# Altium PCB CS Ranka AB.PcbDoc
Units mm, origin at the board's own origin, x right, y up, seen from the top; angles counter-clockwise.
Board outline 17.24 x 36.75 mm, 4 copper layers (Top Layer, Layer 1, Layer 2, Bottom Layer), stack 1.781 mm thick; 13 components, 64 nets, 198 pads, 83 vias.
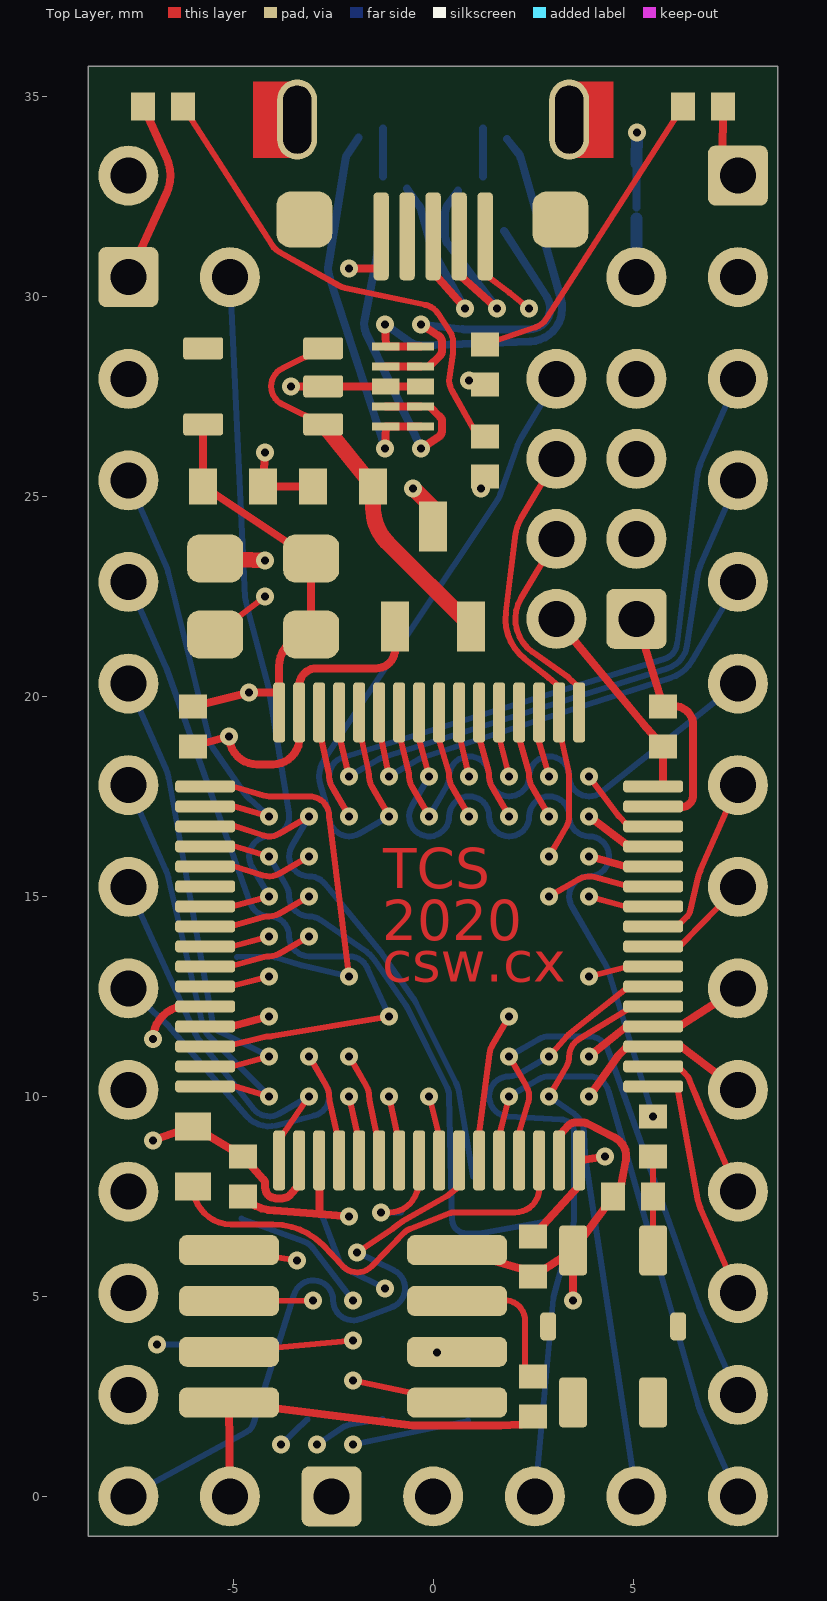
[diagram p0: Top Layer view]
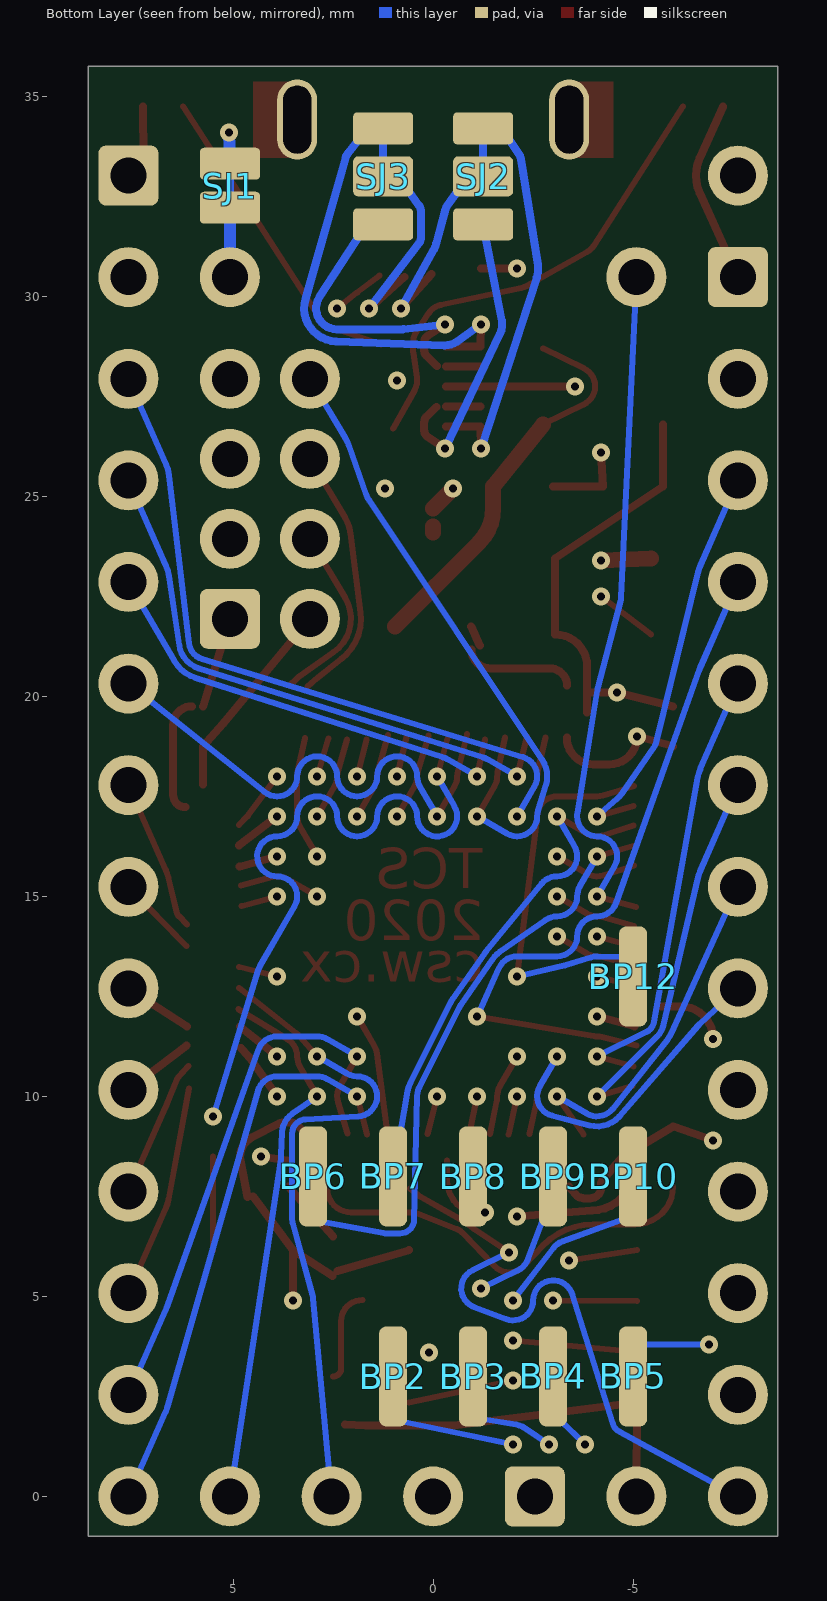
[diagram p1: Bottom Layer view, seen from below]
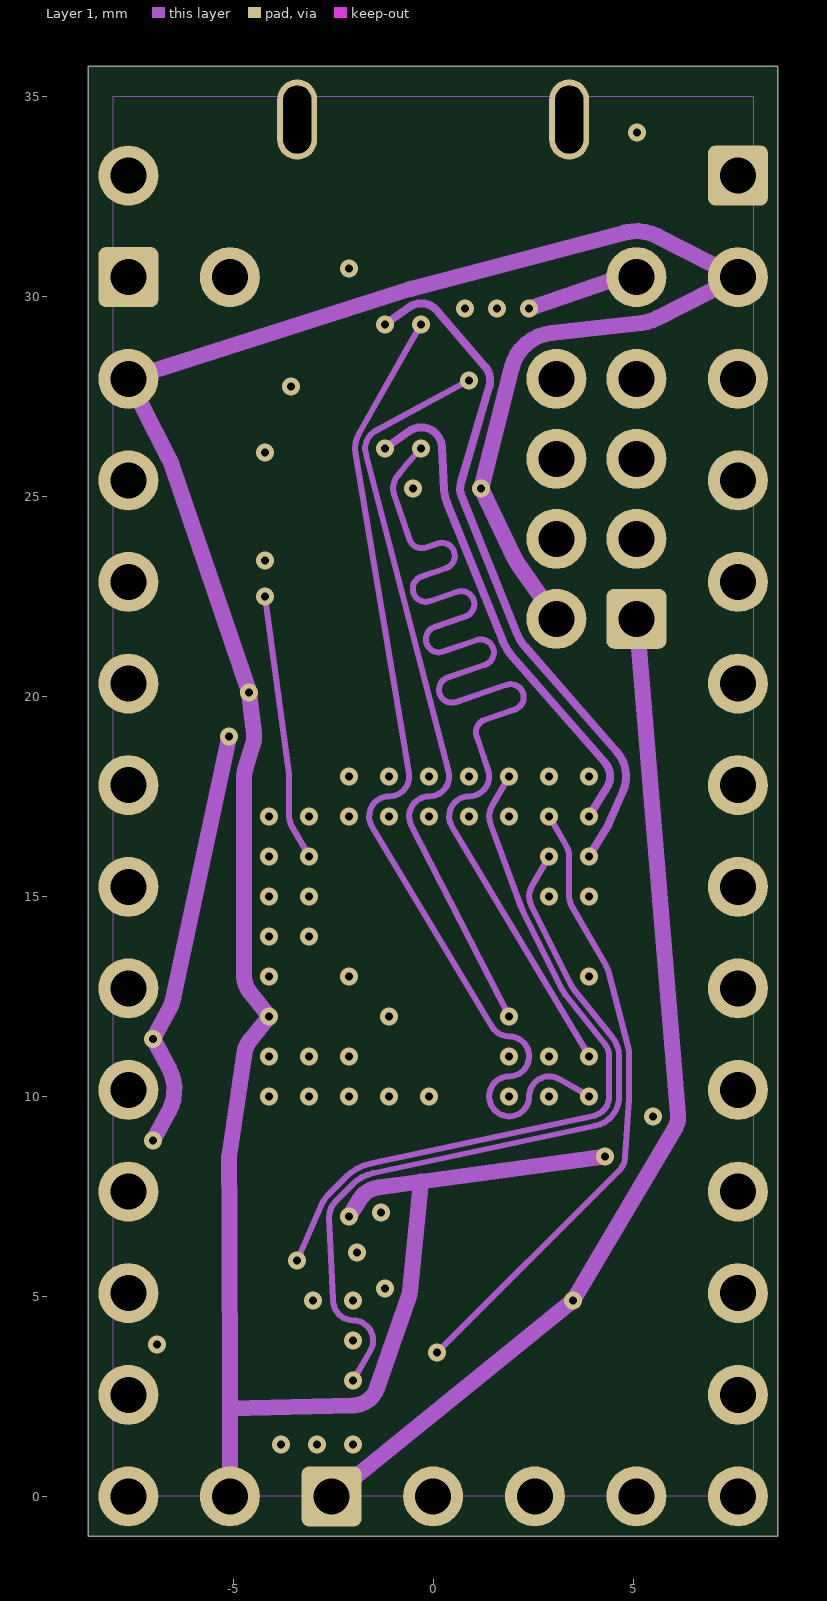
[diagram p2: Layer 1]
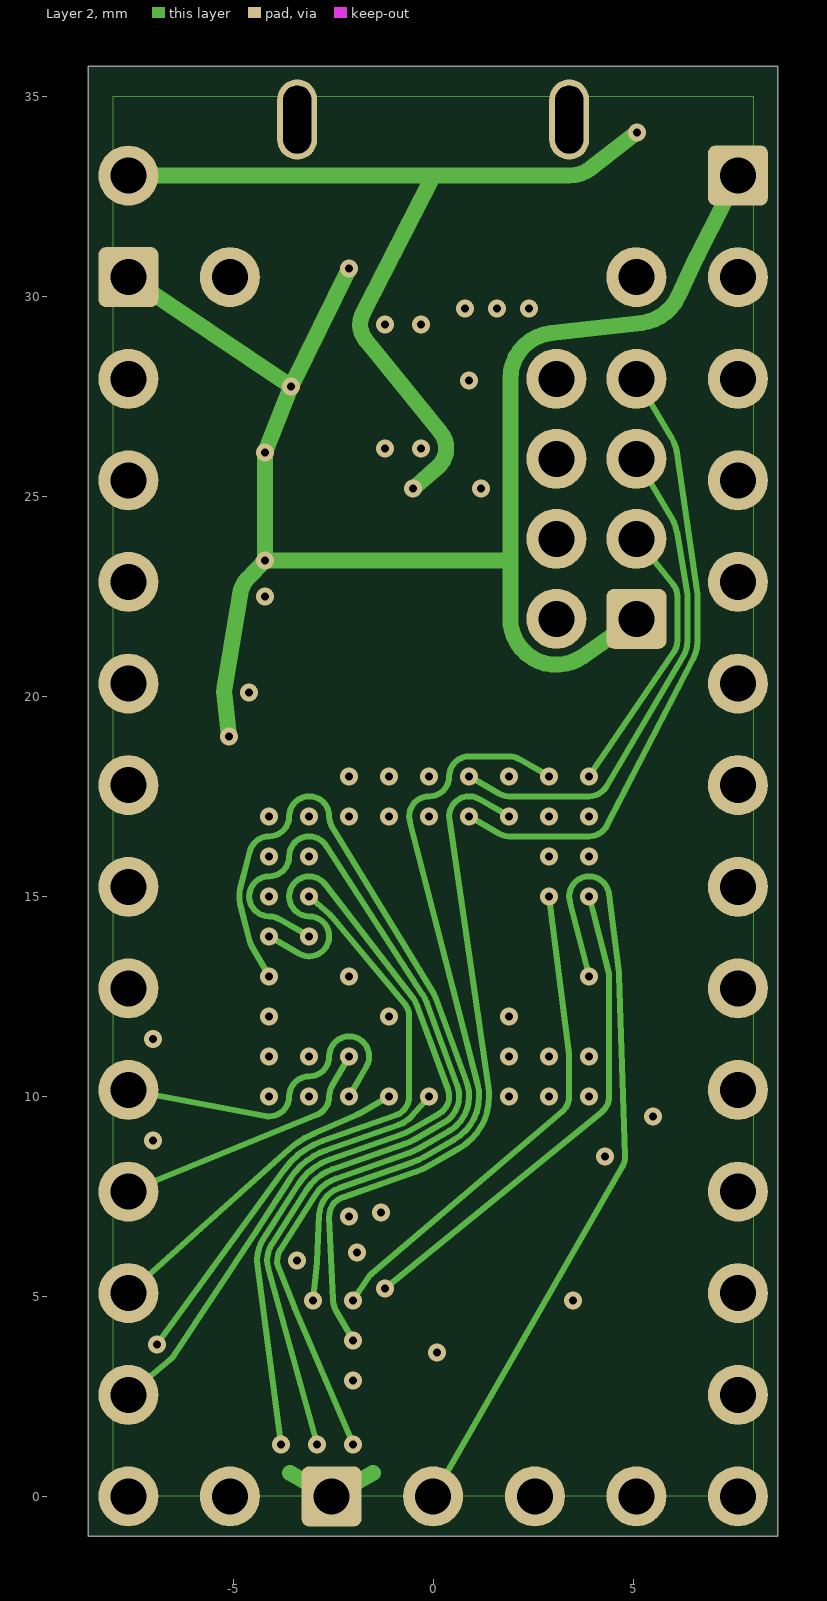
[diagram p3: Layer 2]

## Layer stack, top to bottom
Top Solder: solder mask 0.0254, SM-001, Dk 4
Top Layer: signal copper 0.035
Dielectric 2: prepreg 0.0711, PP-006, Dk 4.1
Layer 1: signal copper 0.035
Dielectric 1: core 1.4986, Core-043, Dk 4.3
Layer 2: signal copper 0.035
Dielectric 3: prepreg 0.0711, PP-006, Dk 4.1
Bottom Layer: signal copper 0.035
Bottom Solder: solder mask 0.0254, SM-001, Dk 4

## Board outline
-8.62,-1 8.62,-1 8.62,35.75 -8.62,35.75

## Design rules (kind name [scope] priority, off if disabled: settings)
Clearance [All] p1: gap=0.2 ignorepadtopadclearanceinfootprint=TRUE except(0: Arc-Hole Track-Hole SMDPad-Hole THPad-Hole Via-Hole Fill-Hole Poly-Hole Region-Hole Text-Hole; 0.1: Arc-Arc Arc-Track Arc-SMDPad Track-Track Track-SMDPad; 0.15: SMDPad-SMDPad; 0.3: Via-Via; 0.5: THPad-THPad)
DiffPairsRouting [All] p1: maxlimit=3 minlimit=0.2 mostfreqgap=0.2 toplayer_minwidth=0.15 toplayer_maxwidth=1 toplayer_prefwidth=0.2 midlayer1_maxgap=0.254 midlayer1_minwidth=0.15 midlayer1_maxwidth=0.381 midlayer1_prefwidth=0.2 midlayer2_maxgap=0.254 midlayer2_minwidth=0.15 midlayer2_maxwidth=0.381 midlayer2_prefwidth=0.2 bottomlayer_minwidth=0.15 bottomlayer_maxwidth=1 bottomlayer_prefwidth=0.2 maxuncoupledlength=12.7
HoleSize [All] p1: absolutevalues=TRUE maxlimit=6.3 minlimit=0.2 maxpercent=80.000 minpercent=20.000
MinimumAnnularRing [All] p1: minimumring=0.13
PlaneClearance [All] p1: clearance=0.5
PlaneConnect [All] p1: planeconnectstyle=Relief reliefexpansion=0.5 reliefentries=4 reliefconductorwidth=0.3 reliefairgap=0.3
PolygonConnect [All] p1: connectstyle=Relief reliefconductorwidth=0.3 reliefentries=4 polygonreliefangle="45 Angle" airgapwidth=0.3
RoutingVias [All] p1: holewidth=0.711 width=1.27 viastyle="Through Hole" minholewidth=0.711 minwidth=1.27 maxholewidth=0.711 maxwidth=1.27
SolderMaskExpansion [All] p1: expansion=0.102 istentingtop=FALSE
UnRoutedNet [All] p1: checkbadconnections=TRUE
Width "Width GND" [InNet('GND')] p1: maxlimit=50 minlimit=0.127 preferedwidth=0.4 toplayer_prefwidth=0.2 bottomlayer_prefwidth=0.2 minimp=50.000000 maximp=50.000000 favimp=50.000000
Width "Width 3V3" [InNet('3V3')] p2: maxlimit=50 minlimit=0.127 preferedwidth=0.4 toplayer_prefwidth=0.2 bottomlayer_prefwidth=0.2 minimp=50.000000 maximp=50.000000 favimp=50.000000
Width [All] p3: maxlimit=50 minlimit=0.1 preferedwidth=0.15
25 further rules are at their usual default settings.

## Classes and differential pairs
differential pair USB: +USB_P -USB_N
differential pair OTG-HS: +OTG-HS_P -OTG-HS_N
differential pair OTG-FS: +OTG-FS_P -OTG-FS_N

## Components (designator, comment, footprint, x,y, rotation, side; value= is the part's Value field where it differs from the comment)
BP2 "CS-TP-A-Compact" CS-TP-A-Compact 1,3 r90 bottom
BP3 "CS-TP-A-Compact" CS-TP-A-Compact -1,3 r90 bottom
BP4 "CS-TP-A-Compact" CS-TP-A-Compact -3,3 r90 bottom
BP5 "CS-TP-A-Compact" CS-TP-A-Compact -5,3 r90 bottom
BP6 "CS-TP-A-Compact" CS-TP-A-Compact 3,8 r90 bottom
BP7 "CS-TP-A-Compact" CS-TP-A-Compact 1,8 r90 bottom
BP8 "CS-TP-A-Compact" CS-TP-A-Compact -1,8 r90 bottom
BP9 "CS-TP-A-Compact" CS-TP-A-Compact -3,8 r90 bottom
BP10 "CS-TP-A-Compact" CS-TP-A-Compact -5,8 r90 bottom
BP12 "CS-TP-A-Compact" CS-TP-A-Compact -5,13 r90 bottom
SJ1 "CS-Select-B-2-1" CS-Select-B-2-1 5.08,32.766 r90 bottom locked net-tie
SJ2 "CS-Select-B-3-1" CS-Select-B-3-1 -1.25,33 r270 bottom locked net-tie
SJ3 "CS-Select-B-3-1" CS-Select-B-3-1 1.25,33 r270 bottom locked net-tie

## Footprints (in the part's own frame and the unit in brackets; to place one, negate y for a bottom-side part, rotate by r counter-clockwise, add the part's x,y. Pads: shape width x height; smd on the part's side, far side on the other; paste and mask are expansions set on the pad)
CS-Select-B-2-1 [mm] "Solder jumper - Type B improved - 2 contacts, connected pair"
  rrect25% 0.8x1.5 smd mask+0.15: 1(-0.55,0) 2(0.55,0)
  Top Layer lines w0.2: -0.55,0 0.55,0
CS-Select-B-3-1 [mm] "Solder jumper - Type B improved - 3 contacts, connected pair"
  rrect25% 0.8x1.5 smd mask+0.15: 1(-1.2,0) 3(1.2,0)
  rrect25% 1x1.5 smd mask+0.15: 2(0,0)
  Top Layer lines w0.2: 0,0 -1.2,0
CS-TP-A-Compact [mm] "Breakout pad"
  rrect50% 2.5x0.7 smd paste-2: 1(0,0)

## Part data
SJ1: "Solder jumper - Type B improved - 2 contacts, connected pair"
SJ2 SJ3: "Solder jumper - Type B improved - 3 contacts, connected pair"

## Free pads (board coordinates)
  round 1.5 hole 0.9: 1(-7.62,33.02) 1(-5.08,0) 1(-5.08,30.48) 1(3.08,21.94) 1(5.08,30.48) 2(3.08,23.94) 2(7.62,30.48) 3(-7.62,27.94) 3(0,0) 3(3.08,25.94) 3(7.62,27.94) 4(-7.62,25.4) 4(2.54,0) 4(3.08,27.94) 4(7.62,25.4) 5(-7.62,22.86) 5(5.08,27.94) 5(5.08,0) 5(7.62,22.86) 6(-7.62,20.32) 6(5.08,25.94) 6(7.62,20.32) 7(-7.62,17.78) 7(5.08,23.94) 7(7.62,17.78) 8(-7.62,15.24) 8(7.62,15.24) 9(-7.62,12.7) 9(7.62,12.7) 10(-7.62,10.16) 10(7.62,10.16) 11(-7.62,7.62) 11(7.62,7.62) 12(-7.62,5.08) 12(7.62,5.08) 13(-7.62,2.54) 13(7.62,2.54) 14(-7.62,0) 14(7.62,0)
  rect 0.6x0.7 smd: 1(-6.25,34.75) 1(4.5,7.5) 1(7.25,34.75) 2(-7.25,34.75) 2(5.5,7.5) 2(6.25,34.75)
  rect 0.9x0.7 smd: 1(-6,7.75) 2(-6,9.25)
  rect 0.7x0.6 smd: 1(-6,18.75) 1(-4.75,8.5) 1(1.3,26.5) 1(1.3,28.8) 1(2.5,3) 1(2.5,5.5) 1(5.5,8.5) 1(5.75,19.75) 2(-6,19.75) 2(-4.75,7.5) 2(1.3,25.5) 2(1.3,27.8) 2(2.5,2) 2(2.5,6.5) 2(5.5,9.5) 2(5.75,18.75)
  rect 0.7x0.9 smd: 1(-5.75,25.25) 1(-1.5,25.25) 2(-4.25,25.25) 2(-3,25.25)
  rrect50% 1.5x0.3 smd: 1(-5.7,17.75) 2(-5.7,17.25) 3(-5.7,16.75) 4(-5.7,16.25) 5(-5.7,15.75) 6(-5.7,15.25) 7(-5.7,14.75) 8(-5.7,14.25) 9(-5.7,13.75) 10(-5.7,13.25) 11(-5.7,12.75) 12(-5.7,12.25) 13(-5.7,11.75) 14(-5.7,11.25) 15(-5.7,10.75) 16(-5.7,10.25) 33(5.5,10.25) 34(5.5,10.75) 35(5.5,11.25) 36(5.5,11.75) 37(5.5,12.25) 38(5.5,12.75) 39(5.5,13.25) 40(5.5,13.75) 41(5.5,14.25) 42(5.5,14.75) 43(5.5,15.25) 44(5.5,15.75) 45(5.5,16.25) 46(5.5,16.75) 47(5.5,17.25) 48(5.5,17.75)
  rrect50% 1.4x1.2 smd: 1(-3.05,23.45) 2(-5.45,23.45) 3(-5.45,21.55) 4(-3.05,21.55)
  rrect25% 1x0.55 smd: 1(-2.75,26.8) 2(-2.75,27.75) 3(-2.75,28.7) 4(-5.75,28.7) 5(-5.75,26.8)
  rect 0.68x0.2 smd: 1(-1.185,28.75) 2(-1.185,28.25) 4(-1.185,27.25) 5(-1.185,26.75) 6(-0.315,26.75) 7(-0.315,27.25) 9(-0.315,28.25) 10(-0.315,28.75)
  rect 0.7x1.25 smd: 1(-0.95,21.75) 2(0.95,21.75) 3(0,24.25)
  rrect50% 2.5x0.75 smd: 1(0.6,2.345) 2(0.6,3.615) 3(0.6,4.885) 4(0.6,6.155) 5(-5.1,6.155) 6(-5.1,4.885) 7(-5.1,3.615) 8(-5.1,2.345)
  rrect50% 0.38x2.2 smd: 1(1.3,31.5) 2(0.65,31.5) 3(0,31.5) 4(-0.65,31.5) 5(-1.3,31.5)
  rrect25% 0.7x1.25 smd: 1(5.501,6.15) 2(5.501,2.35)
  rrect25% 1.5x1.5 hole 0.9: 1(7.62,33.02) 2(-7.62,30.48) 2(-2.54,0) 8(5.08,21.94)
  rect 0.68x0.4 smd: 3(-1.185,27.75) 8(-0.315,27.75)
  rrect25% 0.701x1.25 smd: 3(3.5,6.15) 4(3.5,2.35)
  rrect50% 0.399x0.701 smd: 5(6.125,4.25)
  rrect50% 0.401x0.701 smd: 6(2.875,4.25)
  oval 1x2 hole 0.7 slot 1.7 at 90 deg: 6(3.4,34.42) 7(-3.4,34.42)
  rrect50% 1.4x1.4 smd: 8(3.179,31.92) 9(-3.22,31.92)
  rrect50% 0.3x1.5 smd: 17(-3.85,8.4) 18(-3.35,8.4) 19(-2.85,8.4) 20(-2.35,8.4) 21(-1.85,8.4) 22(-1.35,8.4) 23(-0.85,8.4) 24(-0.35,8.4) 25(0.15,8.4) 26(0.65,8.4) 27(1.15,8.4) 28(1.65,8.4) 29(2.15,8.4) 30(2.65,8.4) 31(3.15,8.4) 32(3.65,8.4) 49(3.65,19.6) 50(3.15,19.6) 51(2.65,19.6) 52(2.15,19.6) 53(1.65,19.6) 54(1.15,19.6) 55(0.65,19.6) 56(0.15,19.6) 57(-0.35,19.6) 58(-0.85,19.6) 59(-1.35,19.6) 60(-1.85,19.6) 61(-2.35,19.6) 62(-2.85,19.6) 63(-3.35,19.6) 64(-3.85,19.6)

## Via types
v1: diameter 0.45, hole 0.2, Top Layer to Bottom Layer, tented both sides, 83 vias

## Nets (pads, with @x,y where several pads share a name; then routed paths per layer and width w, separated by ;. In a path a pad name is that pad's centre, name@x,y a point inside that pad or via, vN(x,y) a via of type N, cw(c..) or ccw(c..) an arc to the next point about the centre after c; other vN are vias at no path point)
3V3: pad.1@3.08,21.94 pad.1@-3.05,23.45 pad.1@-5.08,0 pad.1@-5.75,25.25 pad.2@1.3,25.5 pad.2@2.5,2 pad.2@2.5,6.5 pad.2@5.75,18.75 pad.2@7.62,30.48 pad.2@-4.75,7.5 pad.2@-6,19.75 pad.3@-7.62,27.94 pad.4@-3.05,21.55 pad.5@-5.75,26.8 pad.8@-5.1,2.345 pad.13@-5.7,11.75 pad.19 pad.32 pad.48 pad.64 | length 107.7
  Top Layer w0.2: pad.2@-6,19.75 v1(-4.6,20.1) pad.64@-3.85,20.1 ; pad.5@-5.75,26.8 -5.75,25.25 -3.05,23.45 -3.05,21.55 ccw(c-3.05,20.75) -3.85,20.75 pad.64@-3.85,20.1 ; pad.1@-5.08,0 -5.1,2.345 -0.51,1.773 ccw(c-0.463,2.157) -0.463,1.77 1.662,1.77 ccw(c1.662,2.157) 1.685,1.771 pad.2@2.201,1.801 ; pad.13@-5.027,11.751 v1(-4.1,12) ; pad.2@-4.75,7.5 -4.706,7.456 ccw(c-3.971,8.191) -3.971,7.152 -2.843,7.06 v1(-2.1,7) ; pad.64 pad.64@-3.85,20.1 ; pad.19 -2.842,7.081 ; pad.2@2.5,6.5 pad.32@3.63,7.749 ; pad.1@3.08,21.94 5.246,19.322 ccw(c5.4,19.45) 5.25,19.318 5.75,18.75 pad.48@5.75,17.8 ; pad.32 v1(4.3,8.5)
  Layer 1 w0.4: pad.1@-5.08,0 -5.085,2.2 ; v1(-2.1,7) -1.83,7.432 cw(c-1.3,7.1) -1.384,7.719 -0.309,7.867 ; pad.1@3.08,21.94 2.139,23.279 cw(c3.08,23.94) 2.043,23.443 v1(1.2,25.2) 1.965,28.222 cw(c3.08,27.94) 2.953,29.083 5.209,29.337 ccw(c5.08,30.48) 5.601,29.455 7.62,30.48 5.603,31.504 ccw(c5.08,30.48) 4.966,31.624 ccw(c5.08,30.48) 4.788,31.592 -0.534,30.195 ccw(c-0.3,29.3) -0.581,30.181 -7.62,27.94 -6.596,25.923 cw(c-7.62,25.4) -6.531,25.769 v1(-4.6,20.1) -4.479,19.074 cw(c-5.1,19) -4.503,18.815 -4.697,18.184 ccw(c-4.1,18) -4.725,18 -4.725,17 -4.725,16 -4.725,15 -4.725,14 -4.725,13 ccw(c-4.1,13) -4.588,12.609 v1(-4.1,12) -4.587,11.391 ccw(c-4.1,11) -4.718,11.091 -5.1,8.5 -5.096,7 -5.085,2.2 ; v1(4.3,8.5) -0.309,7.867 ; -5.085,2.2 -2.005,2.275 cw(c-1.995,1.875) -1.997,2.275 ccw(c-2,2.9) -1.409,2.695 -0.61,4.994 ccw(c-1.2,5.2) -0.578,5.139 -0.309,7.867
BOOT0: pad.4@3.08,27.94 pad.60 | length 16.7
  Top Layer w0.15: pad.60@-1.798,18.97 -1.611,18.106 cw(c-2.1,18) -1.6,17.999 ccw(c-1.1,18) -1.533,17.75 v1(-1.1,17)
  Bottom Layer w0.15: v1(-1.1,17) -1.85,16.567 cw(c-2.1,17) -2.6,17 ccw(c-3.1,17) -2.622,17.148 -2.817,17.779 cw(c-2.1,18) -2.724,18.416 1.596,24.894 ccw(c1.2,25.2) 1.671,25.034 2.114,26.282 cw(c3.08,25.94) 2.2,26.465 pad.4@3.08,27.94
BTN: pad.2@5.5,9.5 pad.57 | length 17.4
  Top Layer w0.15: pad.57@-0.354,18.936 v1(-0.1,18)
  Bottom Layer w0.15: v1(-0.1,18) -0.533,17.25 ccw(c-0.1,17) 0.4,17.002 cw(c0.9,17) 0.9,17.5 cw(c0.9,17) 1.4,16.999 ccw(c1.9,17) 1.899,16.5 ccw(c1.9,17) 2.4,17.002 cw(c2.9,17) 2.898,17.5 cw(c2.9,17) 3.4,16.998 3.4,16.996 ccw(c3.9,17) 3.9,16.5 cw(c3.9,16) 4.348,15.777 cw(c3.9,16) 3.9,15.5 ccw(c3.9,15) 3.4,15 ccw(c3.9,15) 3.467,14.75 4.332,13.251 cw(c3.9,13) 4.378,13.146 v1(5.5,9.5)
F-CK: pad.6@-5.1,4.885 pad.51 | length 22.3
  Top Layer w0.15: pad.6@-5.1,4.885 v1(-3,4.9) ; pad.51@2.623,18.942 v1(2.9,18)
  Layer 2 w0.15: v1(-3,4.9) -2.903,5.848 ccw(c-3.4,5.9) -2.9,5.879 -2.849,7.033 cw(c-2.1,7) -2.347,7.708 -0.521,8.349 ccw(c-1.1,10) -0.226,8.484 0.317,8.797 0.526,8.918 ccw(c-0.1,10) 1.15,10.003 ccw(c-0.1,10) 1.11,10.313 -0.584,16.875 cw(c-0.1,17) -0.6,17 cw(c-0.1,17) -0.098,17.5 ccw(c-0.1,18) 0.4,18.002 cw(c0.9,18) 0.9,18.5 1.898,18.5 cw(c1.9,18) 2.151,18.432 v1(2.9,18)
F-CS: pad.1@0.6,2.345 pad.3@3.08,25.94 pad.50 | length 32.2
  Top Layer w0.15: v1(-2,2.9) pad.1@0.6,2.345 ; v1(2.9,16) 3.332,16.749 ccw(c2.9,17) 3.4,17.002 3.4,17.998 ccw(c2.9,18) 3.388,18.109 pad.50@3.202,18.956 ; pad.3@3.08,25.94 2.2,24.465 ccw(c3.08,23.94) 2.063,24.068 1.815,22.099 ccw(c3.08,21.94) 2.288,20.941 2.88,20.471 cw(c2.725,20.275) 2.889,20.464 pad.50@3.143,20.245
  Layer 1 w0.15: v1(-2,2.9) -1.568,3.649 ccw(c-2,3.9) -2.001,4.4 cw(c-2,4.9) -2.5,4.9 ccw(c-3,4.9) -2.501,4.924 -2.599,6.976 cw(c-2.1,7) -2.456,7.351 -2.013,7.801 cw(c-1.3,7.1) -1.507,8.078 4.057,9.267 ccw(c3.9,10) 4.588,9.702 ccw(c3.9,10) 4.65,10.002 4.65,10.998 ccw(c3.9,11) 4.485,11.47 3.51,12.688 cw(c3.9,13) 3.453,12.776 2.453,14.776 cw(c2.9,15) 2.467,15.25 v1(2.9,16)
F-HD: pad.7@-5.1,3.615 pad.54 | length 22.9
  Top Layer w0.15: pad.7@-5.1,3.615 v1(-2,3.9) ; pad.54@1.13,19.038 1.381,18.135 cw(c0.9,18) 1.4,17.999 ccw(c1.9,18) 1.467,17.75 v1(1.9,17)
  Layer 2 w0.15: v1(-2,3.9) -2.433,4.65 cw(c-2,4.9) -2.5,4.9 ccw(c-3,4.9) -2.501,4.924 -2.599,6.976 cw(c-2.1,7) -2.264,7.472 -0.437,8.113 ccw(c-1.1,10) -0.101,8.267 0.65,8.701 ccw(c-0.1,10) 1.4,10.003 ccw(c-0.1,10) 1.384,10.219 0.405,16.928 cw(c0.9,17) 1.151,17.432 v1(1.9,17)
F-MISO: pad.2@0.6,3.615 pad.52 | length 17.9
  Top Layer w0.15: pad.52@2.157,18.923 2.381,18.138 cw(c1.9,18) 2.4,17.999 ccw(c2.9,18) 2.467,17.75 v1(2.9,17)
  Layer 1 w0.15: v1(0.1,3.6) 4.653,8.146 ccw(c4.3,8.5) 4.799,8.467 4.898,9.932 ; v1(2.9,17) 3.332,16.251 cw(c2.9,16) 3.4,16 3.4,15 ccw(c3.9,15) 3.467,14.75 4.332,13.251 cw(c3.9,13) 4.384,13.124 4.868,11.251 cw(c3.9,11) 4.9,10.998 4.9,10.002 cw(c3.9,10) 4.898,9.932
F-MOSI: pad.5@-5.1,6.155 pad.53 | length 21.1
  Top Layer w0.15: pad.5@-5.1,6.155 v1(-3.4,5.9) ; pad.53@1.666,18.917 v1(1.9,18)
  Layer 1 w0.15: v1(-3.4,5.9) -2.787,7.301 cw(c-2.1,7) -2.636,7.525 -2.191,7.977 cw(c-1.3,7.1) -1.559,8.323 4.004,9.511 ccw(c3.9,10) 4.374,9.841 ccw(c3.9,10) 4.4,10.002 4.4,10.998 ccw(c3.9,11) 4.29,11.313 3.314,12.532 cw(c3.9,13) 3.229,12.665 2.229,14.666 cw(c2.9,15) 2.196,14.742 1.431,16.828 cw(c1.9,17) 1.4,17 cw(c1.9,17) 1.467,17.25 v1(1.9,18)
GND: pad.1@2.5,5.5 pad.1@4.5,7.5 pad.1@5.75,19.75 pad.1@7.25,34.75 pad.1@7.62,33.02 pad.1@-0.95,21.75 pad.1@-4.75,8.5 pad.1@-6,18.75 pad.2@-2.54,0 pad.2@-2.75,27.75 pad.2@-3,25.25 pad.2@-4.25,25.25 pad.2@-5.45,23.45 pad.2@-6,9.25 pad.2@-7.25,34.75 pad.2@-7.62,30.48 pad.3@3.5,6.15 pad.3@-1.185,27.75 pad.4@0.6,6.155 pad.5@-1.3,31.5 pad.8@5.08,21.94 pad.8@-0.315,27.75 pad.12@-5.7,12.25 pad.18 pad.31 pad.47 pad.63 | length 122.2
  Top Layer w0.2: pad.2@-7.62,30.48 -6.664,32.586 ccw(c-7.62,33.02) -6.664,33.455 pad.2@-7.25,34.75 ; v1(-7,8.9) -6,9.25 -4.75,8.5 -4.25,7.933 cw(c-4.4,7.8) -4.2,7.799 -4.2,7.725 ccw(c-3.925,7.725) -3.925,7.45 -3.775,7.45 ccw(c-3.775,7.725) -3.566,7.546 pad.18@-3.396,7.744 ; v1(-7,11.44) cw(c-6.19,11.44) -6.19,12.25 pad.12@-5.7,12.25 ; pad.1@-6,18.75 v1(-5.1,19) ccw(c-4.4,19) -4.4,18.3 -4.009,18.3 ccw(c-4.009,18.968) pad.63@-3.34,18.968 ; v1(-4.2,26.1) -4.25,25.25 pad.2@-3,25.25 ; v1(-3.55,27.75) -2.75,27.75 -1.185,27.75 pad.8@-0.315,27.75 ; pad.63@-3.349,20.266 cw(c-2.916,20.266) -2.916,20.7 -1.428,20.7 ccw(c-1.428,21.173) pad.1@-0.954,21.173 ; v1(-2.1,30.7) pad.5@-1.2,30.7 ; pad.1@-1.168,21.27 pad.1@-0.95,21.75 ; pad.4@0.6,6.155 pad.1@2.387,5.634 ; pad.1@2.511,5.51 pad.3@3.5,6.15 ; pad.31@3.192,9.067 3.374,9.262 cw(c3.575,9.075) 3.575,9.35 3.725,9.35 cw(c3.725,9.075) 3.851,9.319 4.538,8.968 cw(c4.3,8.5) 4.816,8.403 pad.1@4.644,7.484 ; v1(3.5,4.9) pad.3@3.5,6.15 ; pad.1@4.5,7.5 pad.3@3.5,6.15 ; pad.8@5.08,21.94 pad.1@5.75,19.75 ; pad.1@6.033,19.752 cw(c6.033,19.286) 6.5,19.286 6.5,17.533 cw(c6.198,17.533) pad.47@6.198,17.231 ; pad.1@7.239,33.413 pad.1@7.25,34.75
  Top Layer w0.4: pad.2@-5.45,23.45 v1(-4.2,23.4)
  Layer 1 w0.4: v1(-7,8.9) -6.612,9.606 ccw(c-7.62,10.16) -6.607,10.704 v1(-7,11.44) -6.612,12.146 ccw(c-7.62,12.7) -6.495,12.461 v1(-5.1,19) ; pad.2@-2.54,0 v1(3.5,4.9) 6.037,9.181 ccw(c5.5,9.5) 6.125,9.5 ccw(c5.5,9.5) 6.123,9.554 pad.8@5.08,21.94
  Layer 2 w0.4: pad.2@-7.62,30.48 v1(-3.55,27.75) ; v1(-5.1,19) -5.221,20.027 cw(c-4.6,20.1) -5.216,20.203 -4.816,22.603 cw(c-4.2,22.5) -4.65,22.934 v1(-4.2,23.4) ; -3.576,0.585 -2.54,0 -1.504,0.585 ; v1(-2.1,30.7) v1(-3.55,27.75) ; pad.8@5.08,21.94 3.742,21 ; pad.1@7.62,33.02 6.595,31.002 ccw(c7.62,30.48) 6.579,30.968 6.122,29.993 cw(c5.08,30.48) 5.209,29.337 2.953,29.083 ccw(c3.08,27.94) 1.93,27.94 1.93,23.94 ccw(c3.08,23.94) 1.931,23.889 1.931,23.888 cw(c1.532,23.87) 1.932,23.868 1.931,23.4 ; v1(-4.2,23.4) 1.931,23.4 ; v1(-4.2,23.4) v1(-4.2,26.1) v1(-3.55,27.75) ; 1.931,23.4 1.93,21.941 ccw(c3.08,21.94) 2.015,21.506 ccw(c3.08,21.94) 3.322,20.816 ; 3.322,20.816 ccw(c3.08,21.94) 3.742,21 ; 3.322,20.816 ccw(c3.08,21.94) 3.742,21
JTDO: pad.6@5.08,25.94 pad.55 | length 13.7
  Top Layer w0.15: pad.55@0.666,18.983 v1(0.9,18)
  Layer 2 w0.15: v1(0.9,18) 1.65,17.567 ccw(c1.9,18) 1.9,17.5 3.901,17.5 ccw(c3.9,18) 4.331,17.747 6.256,21.015 ccw(c5.643,21.377) 6.355,21.377 6.355,22.502 ccw(c5.643,22.502) 6.345,22.623 6.091,24.112 ccw(c5.08,23.94) 5.959,24.467 pad.6@5.08,25.94
LED: pad.2@1.3,27.8 pad.27 | length 22
  Top Layer w0.15: pad.27@1.133,8.963 1.404,11.064 cw(c1.9,11) 1.467,11.25 v1(1.9,12)
  Layer 1 w0.15: v1(0.9,27.9) -1.436,26.641 ccw(c-1.2,26.2) -1.684,26.074 0.384,18.127 cw(c-0.1,18) 0.3,17.7 cw(c-0.1,18) -0.098,17.5 ccw(c-0.1,17) -0.545,16.772 v1(1.9,12)
NetBN1_1: pad.1@5.5,8.5 pad.1@5.501,6.15 pad.2@5.5,7.5 | length 2.4
  Top Layer w0.15: pad.1@5.501,6.15 5.5,7.5 pad.1@5.5,8.5
NetC1_1: pad.1@-6,7.75 pad.30 | length 10.5
  Top Layer w0.15: pad.1@-6,7.75 ccw(c-5.05,7.75) -5.05,6.8 -4,6.8 cw(c-4,5.037) -2.754,6.284 ; -2.753,6.283 cw(c-2.859,6.177) -2.749,6.279 -2.266,5.76 ccw(c-1.9,6.1) -2.122,5.652 ccw(c-1.9,6.1) -1.541,5.752 -0.723,6.595 cw(c-0.463,6.342) -0.595,6.68 0.441,7.089 cw(c0.497,6.95) 0.497,7.1 2.051,7.1 ccw(c2.051,7.701) pad.30@2.652,7.701
NetC6_1: pad.1@-1.5,25.25 pad.1@-2.75,26.8 pad.2@0.95,21.75 pad.3@-2.75,28.7 | length 9.8
  Top Layer w0.15: pad.1@-2.75,26.8 -3.77,27.301 cw(c-3.55,27.75) -4.024,27.909 cw(c-3.55,27.75) -3.77,28.199 pad.3@-2.75,28.7
  Top Layer w0.4: pad.1@-2.75,26.8 -1.5,25.25 -1.5,24.7 ccw(c-0.294,24.7) -1.147,23.847 pad.2@0.95,21.75
NetD1_1: pad.1@1.3,26.5 pad.1@-6.25,34.75 | length 11.8
  Top Layer w0.15: pad.1@-6.25,34.75 -4.03,31.285 ccw(c-3.588,31.568) -3.986,31.225 ccw(c-3.588,31.568) -3.846,31.111 -2.346,30.265 ccw(c-2.1,30.7) -2.203,30.211 -0.198,29.79 cw(c-0.3,29.3) -0.137,29.773 cw(c-0.3,29.3) 0.119,29.573 0.422,29.111 cw(c0.025,28.85) 0.491,28.939 cw(c0.025,28.85) 0.5,28.85 0.5,28.65 cw(c0.025,28.65) 0.495,28.579 0.405,27.973 ccw(c0.9,27.9) 0.464,27.655 pad.1@1,26.7
NetD2_2: pad.1@1.3,28.8 pad.2@6.25,34.75 | length 8
  Top Layer w0.15: pad.1@1.3,28.8 2.56,29.226 ccw(c2.4,29.7) 2.82,29.429 pad.2@6.25,34.75
NetR3_1: pad.1@2.5,3 pad.3@0.6,4.885 | length 2.3
  Top Layer w0.15: pad.3@1.772,4.909 cw(c1.772,4.381) 2.3,4.381 2.3,3.2 ccw(c2.5,3.2) pad.1@2.5,3
NJTRST: pad.5@5.08,27.94 pad.56 | length 17.9
  Top Layer w0.15: pad.56@0.113,19.016 0.378,18.147 cw(c-0.1,18) 0.4,17.999 ccw(c0.9,18) 0.467,17.75 v1(0.9,17)
  Layer 2 w0.15: v1(0.9,17) 1.65,16.567 ccw(c1.9,17) 1.9,16.5 3.9,16.5 ccw(c3.9,17) 4.125,16.553 ccw(c3.9,17) 4.344,16.77 6.497,20.934 ccw(c5.643,21.377) 6.605,21.377 6.605,22.502 ccw(c5.643,22.502) 6.595,22.642 6.095,26.086 ccw(c5.08,25.94) 5.959,26.467 pad.5@5.08,27.94
NRST: pad.1@-5.08,30.48 pad.7@-5.7,14.75 | length 17.3
  Top Layer w0.15: pad.7@-5.075,14.737 v1(-4.1,15)
  Bottom Layer w0.15: pad.1@-5.08,30.48 -4.699,22.476 ccw(c-4.2,22.5) -4.683,22.372 -4.117,20.229 cw(c-4.6,20.1) -4.102,20.148 -3.607,17.081 cw(c-4.1,17) -3.6,17.002 cw(c-4.1,17) -4.1,16.5 ccw(c-4.1,16) -4.533,15.75 v1(-4.1,15)
OSC: pad.3@-5.45,21.55 pad.5@-5.7,15.75 | length 10.3
  Top Layer w0.15: pad.3@-5.45,21.55 v1(-4.2,22.5) ; pad.5@-5.019,15.768 -4.252,15.524 ccw(c-4.1,16) -3.85,15.567 v1(-3.1,16)
  Layer 1 w0.15: v1(-4.2,22.5) -3.605,18.068 cw(c-4.1,18) -3.6,18 -3.6,17 ccw(c-3.1,17) -3.533,16.75 v1(-3.1,16)
OTG-FS_N: pad.1@-1.185,28.75 pad.10@-0.315,28.75 pad.44 SJ3.1 | length 29.1
  Top Layer w0.2: v1(-1.2,29.3) -1.185,28.75 pad.10@-0.315,28.75 ; v1(3.9,16) pad.44@4.837,15.742
  Layer 1 w0.2: v1(-1.2,29.3) -0.607,29.726 cw(c-0.3,29.3) -0.3,29.825 cw(c-0.3,29.3) 0.099,29.641 1.298,28.243 cw(c0.9,27.9) 1.425,27.9 cw(c0.9,27.9) 1.404,27.752 0.696,25.348 ccw(c1.2,25.2) 0.713,25.004 2.106,21.547 ccw(c3.08,21.94) 2.198,21.37 ccw(c3.08,21.94) 2.289,21.249 4.596,18.61 cw(c3.9,18) 4.747,17.629 4.381,16.79 cw(c3.9,17) 4.347,16.724 v1(3.9,16)
  Bottom Layer w0.2: v1(-1.2,29.3) -0.606,28.874 ccw(c-0.3,29.3) -0.281,28.775 2.43,28.876 ccw(c2.4,29.7) 3.137,29.33 ccw(c2.4,29.7) 3.193,29.927 2.188,33.463 ccw(c1.875,33.375) 2.129,33.578 SJ3.1@1.845,33.934
OTG-FS_P: pad.5@-1.185,26.75 pad.6@-0.315,26.75 pad.45 SJ2.1 | length 23.2
  Top Layer w0.2: v1(-1.2,26.2) -1.185,26.75 pad.6@-0.315,26.75 ; v1(3.9,17) pad.45@4.852,16.273
  Layer 1 w0.2: v1(-1.2,26.2) -0.607,26.626 cw(c-0.3,26.2) -0.3,26.725 cw(c-0.3,26.2) 0.224,26.225 0.276,25.155 ccw(c1.2,25.2) 0.342,24.854 1.735,21.398 ccw(c3.08,21.94) 1.863,21.152 ccw(c3.08,21.94) 1.987,20.987 4.295,18.346 cw(c3.9,18) 4.425,18 cw(c3.9,18) 4.347,17.724 v1(3.9,17)
  Bottom Layer w0.2: SJ2.1@-1.869,33.967 -2.144,33.557 ccw(c-1.875,33.375) -2.196,33.426 -2.618,30.783 ccw(c-2.1,30.7) -2.615,30.598 -2.591,30.478 ccw(c-2.395,30.516) -2.585,30.454 v1(-1.2,26.2)
OTG-HS_N: pad.2@-1.185,28.25 pad.9@-0.315,28.25 pad.10@7.62,10.16 pad.35 SJ3.3 | length 37.3
  Top Layer w0.2: pad.2@-1.185,28.25 pad.9@-0.315,28.25 ; v1(-0.3,29.3) 0.133,29.018 cw(c0.025,28.85) 0.225,28.85 0.225,28.65 cw(c0.025,28.65) 0.162,28.504 pad.9@-0.093,28.263 ; v1(3.9,10) 4.601,10.984 cw(c4.825,10.825) 4.626,11.015 pad.35@4.807,11.206 ; pad.35@6.17,11.269 pad.10@7.62,10.16
  Layer 1 w0.15: v1(-0.3,29.3) -0.636,28.721 -1.853,26.569 ccw(c-1.2,26.2) -1.94,26.077 -0.607,18.083 cw(c-1.1,18) -0.693,17.709 cw(c-1.1,18) -1.1,17.5 ccw(c-1.1,17) -1.529,16.743 1.471,11.743 ccw(c1.9,12) 1.899,11.5 ; 1.9,11.5 cw(c1.9,11) 2.143,10.563 cw(c1.9,11) 1.9,10.5 ccw(c1.9,10) 1.4,10 ccw(c1.9,10) 1.899,9.5 ccw(c1.9,10) 2.325,9.736 ccw(c1.9,10) 2.4,10.002 cw(c2.9,10) 2.9,10.5 cw(c2.9,10) 3.151,10.432 v1(3.9,10)
  Bottom Layer w0.2: v1(-0.3,29.3) 0.739,29.179 ccw(c0.8,29.7) 0.8,29.175 2.4,29.175 ccw(c2.4,29.7) 2.84,29.987 SJ3.3@1.77,31.639
OTG-HS_P: pad.4@-1.185,27.25 pad.7@-0.315,27.25 pad.9@7.62,12.7 pad.36 SJ2.3 | length 38
  Top Layer w0.2: pad.4@-1.185,27.25 pad.7@-0.315,27.25 ; v1(-0.3,26.2) 0.134,26.482 ccw(c0.025,26.65) 0.225,26.65 0.225,26.85 ccw(c0.025,26.85) 0.166,26.992 pad.7@-0.08,27.239 ; v1(3.9,11) pad.36@4.835,11.748 ; pad.36@6.158,11.751 pad.9@7.62,12.7
  Layer 1 w0.15: v1(-0.3,26.2) -0.635,25.832 -0.89,25.513 ccw(c-0.5,25.2) -0.973,25.039 -0.617,23.994 -0.593,23.923 ccw(c-0.285,24.028) -0.18,23.721 0.112,23.82 cw(c0.217,23.513) 0.525,23.618 cw(c0.217,23.513) 0.322,23.205 -0.29,22.996 ccw(c-0.185,22.689) -0.493,22.584 ccw(c-0.185,22.689) -0.08,22.381 0.599,22.613 cw(c0.704,22.305) 1.012,22.41 cw(c0.704,22.305) 0.809,21.998 0.038,21.735 ccw(c0.143,21.427) -0.164,21.322 ccw(c0.143,21.427) 0.248,21.12 1.086,21.405 cw(c1.191,21.098) 1.296,20.79 0.366,20.473 ccw(c0.471,20.166) 0.164,20.061 ccw(c0.471,20.166) 0.576,19.858 1.834,20.287 cw(c1.939,19.98) 2.044,19.672 1.289,19.414 ccw(c1.394,19.107) 1.086,19.002 1.211,18.636 1.265,18.478 1.289,18.407 1.373,18.162 cw(c0.9,18) 1.368,17.825 cw(c0.9,18) 0.902,17.5 ccw(c0.9,17) 0.471,16.744 v1(3.9,11)
  Bottom Layer w0.2: SJ2.3 -1.715,29.4 ccw(c-1.2,29.3) -1.674,29.074 v1(-0.3,26.2)
PA0: pad.5@-7.62,22.86 pad.14@-5.7,11.25 | length 17.7
  Top Layer w0.15: pad.14@-5.085,11.268 -4.222,11.485 cw(c-4.1,11) -4.099,11.5 ccw(c-4.1,12) -4.017,11.507 v1(-1.1,12)
  Bottom Layer w0.15: pad.5@-7.62,22.86 -6.683,20.736 cw(c-7.62,20.32) -6.654,20.663 -4.571,14.832 ccw(c-4.1,15) -4.101,14.5 ; -4.1,14.5 cw(c-4.1,14) -3.6,13.999 ccw(c-3.1,14) -3.101,13.5 ; -3.1,13.5 cw(c-3.1,13) -3.098,13.5 -2.102,13.5 cw(c-2.1,13) -2.1,13.5 cw(c-2.1,13) -1.644,13.204 v1(-1.1,12)
PA1: pad.6@-7.62,20.32 pad.15 | length 11.4
  Top Layer w0.15: pad.15@-5.008,10.752 v1(-4.1,11)
  Bottom Layer w0.15: pad.6@-7.62,20.32 -6.683,18.195 cw(c-7.62,17.78) -6.611,17.959 -5.52,11.863 ccw(c-5.175,11.925) -5.331,11.612 v1(-4.1,11)
PA2: pad.7@-7.62,17.78 pad.16 | length 9.7
  Top Layer w0.15: pad.16@-4.981,10.26 v1(-4.1,10)
  Bottom Layer w0.15: pad.7@-7.62,17.78 -6.683,15.656 cw(c-7.62,15.24) -6.622,15.472 -5.759,11.788 ccw(c-5.175,11.925) -5.599,11.501 v1(-4.1,10)
PA3: pad.8@-7.62,15.24 pad.17 | length 9.1
  Top Layer w0.15: pad.17@-3.756,9.051 v1(-3.1,10)
  Bottom Layer w0.15: pad.8@-7.62,15.24 -5.948,11.572 ccw(c-5.175,11.925) -5.842,11.398 -4.492,9.69 ccw(c-4.1,10) -3.85,9.567 v1(-3.1,10)
PA4: pad.9@-7.62,12.7 pad.20 | length 10
  Top Layer w0.15: v1(-3.1,11) -2.668,10.251 cw(c-3.1,10) -2.6,10 ccw(c-2.1,10) -2.588,9.893 pad.20@-2.407,9.064
  Bottom Layer w0.15: pad.9@-7.62,12.7 -6.66,11.807 cw(c-7,11.44) -6.621,11.766 -4.667,9.509 ccw(c-4.1,10) -4.651,9.491 ccw(c-4.1,10) -3.913,9.274 -2.975,9.516 ccw(c-3.1,10) -2.626,9.841 ccw(c-3.1,10) -2.668,10.251 v1(-3.1,11)
PA5: pad.10@-7.62,10.16 pad.21 | length 9.6
  Top Layer w0.15: v1(-2.1,10) pad.21@-1.889,9.047
  Layer 2 w0.15: pad.10@-7.62,10.16 -4.193,9.509 ccw(c-4.1,10) -4.101,9.5 ccw(c-4.1,10) -3.6,10.002 cw(c-3.1,10) -3.098,10.5 ccw(c-3.1,11) -2.6,11.002 cw(c-2.1,11) -2.1,11.5 cw(c-2.1,11) -1.668,10.749 v1(-2.1,10)
PA6: pad.11@-7.62,7.62 pad.22 | length 8.9
  Top Layer w0.15: v1(-2.1,11) -1.668,10.251 cw(c-2.1,10) -1.6,10 ccw(c-1.1,10) -1.59,9.9 pad.22@-1.417,9.053
  Layer 2 w0.15: pad.11@-7.62,7.62 -2.912,9.537 ccw(c-3.1,10) -2.747,9.646 ccw(c-3.1,10) -2.6,10 cw(c-2.1,10) -2.533,10.25 v1(-2.1,11)
PA7: pad.12@-7.62,5.08 pad.23 | length 9.2
  Top Layer w0.15: v1(-1.1,10) pad.23@-0.905,9.075
  Layer 2 w0.15: pad.12@-7.62,5.08 -3.6,8.677 cw(c-2.1,7) -2.997,9.064 -1.9,9.542 ccw(c-2.1,10) -1.85,9.567 v1(-1.1,10)
PA8: pad.7@7.62,17.78 pad.41 | length 3.8
  Top Layer w0.15: pad.41@6.156,14.3 6.353,14.499 ccw(c6.175,14.675) 6.418,14.618 6.623,15.477 cw(c7.62,15.24) 6.683,15.655 pad.7@7.62,17.78
PA9: BP9.1 pad.42 | length 15.9
  Top Layer w0.15: v1(3.9,15) pad.42@4.786,14.753
  Layer 2 w0.15: v1(-1.2,5.2) 4.216,9.612 ccw(c3.9,10) 4.374,9.841 ccw(c3.9,10) 4.4,10.002 4.4,10.998 ccw(c3.9,11) 4.4,11 4.4,12.998 ccw(c3.9,13) 4.384,13.126 v1(3.9,15)
  Bottom Layer w0.15: BP9.1@-2.761,6.976 -2.368,5.925 ccw(c-1.9,6.1) -2.12,5.651 v1(-1.2,5.2)
PA10: BP10.1 pad.43 | length 18.2
  Top Layer w0.15: v1(2.9,15) 3.65,15.433 cw(c3.9,15) 4.031,15.483 pad.43@4.809,15.273
  Layer 2 w0.15: v1(-2,4.9) -1.617,5.476 cw(c-1.2,5.2) -1.523,5.581 3.223,9.619 ccw(c2.9,10) 3.347,9.775 ccw(c2.9,10) 3.4,10.002 3.4,10.998 ccw(c2.9,11) 3.396,11.063 v1(2.9,15)
  Bottom Layer w0.15: BP10.1@-4.793,6.944 -3.229,6.37 cw(c-3.4,5.9) -3.003,6.204 v1(-2,4.9)
PB0: pad.13@-7.62,2.54 pad.25 | length 11.9
  Top Layer w0.15: v1(-0.1,10) pad.25@0.139,9.062
  Layer 2 w0.15: pad.13@-7.62,2.54 -6.578,3.417 ccw(c-6.9,3.8) -6.51,3.488 ccw(c-6.9,3.8) -6.484,3.523 -4.452,6.575 -3.573,7.945 cw(c-2.1,7) -3.15,8.4 cw(c-2.1,7) -2.678,8.652 -0.851,9.293 ccw(c-1.1,10) -0.698,9.367 ccw(c-1.1,10) -0.537,9.505 v1(-0.1,10)
PB1: pad.14@-7.62,0 pad.26 | length 15.4
  Top Layer w0.15: v1(-1.9,6.1) -1.023,6.684 ccw(c-1.3,7.1) -0.992,6.706 -0.84,6.825 cw(c-0.463,6.342) -0.764,6.876 0.348,7.508 ccw(c0.225,7.725) 0.384,7.532 pad.26@0.583,7.696
  Bottom Layer w0.15: pad.14@-7.62,0 -4.657,1.618 ccw(c-4.825,1.925) -4.491,1.82 -3.477,5.05 cw(c-3,4.9) -2.5,4.899 ccw(c-2,4.9) -1.824,4.432 -1.024,4.732 ccw(c-1.2,5.2) -0.978,4.752 ccw(c-1.2,5.2) -0.981,5.65 v1(-1.9,6.1)
PB6: pad.6@7.62,20.32 pad.58 | length 13.5
  Top Layer w0.15: pad.58@-0.85,19.059 -0.615,18.123 cw(c-1.1,18) -0.6,17.999 ccw(c-0.1,18) -0.533,17.75 v1(-0.1,17)
  Bottom Layer w0.15: v1(-0.1,17) 0.332,17.749 ccw(c-0.1,18) 0.4,18.001 0.4,18.004 cw(c0.9,18) 0.9,18.5 cw(c0.9,18) 1.4,17.999 ccw(c1.9,18) 1.899,17.5 ccw(c1.9,18) 2.343,17.768 ccw(c1.9,18) 2.4,18.002 cw(c2.9,18) 3.4,17.999 ccw(c3.9,18) 3.484,17.723 ccw(c3.9,18) 3.899,17.5 ccw(c3.9,18) 4.211,17.609 pad.6@7.62,20.32
PB7: pad.5@7.62,22.86 pad.59 | length 11.4
  Top Layer w0.15: pad.59@-1.293,18.916 v1(-1.1,18)
  Bottom Layer w0.15: v1(-1.1,18) -0.35,18.433 cw(c-0.1,18) -0.252,18.476 5.936,20.461 ccw(c5.643,21.377) 6.475,20.894 pad.5@7.62,22.86
PB8: pad.4@7.62,25.4 pad.61 | length 14.6
  Top Layer w0.15: pad.61@-2.343,18.998 v1(-2.1,18)
  Bottom Layer w0.15: v1(-2.1,18) -1.35,18.433 cw(c-1.1,18) -1.249,18.477 5.855,20.697 ccw(c5.643,21.377) 6.233,20.979 ccw(c5.643,21.377) 6.347,21.274 6.606,23.011 cw(c7.62,22.86) 6.682,23.274 pad.4@7.62,25.4
PB9: pad.3@7.62,27.94 pad.62 | length 19.7
  Top Layer w0.15: pad.62@-2.807,18.97 -2.613,18.111 cw(c-3.1,18) -2.6,17.999 ccw(c-2.1,18) -2.533,17.75 v1(-2.1,17)
  Bottom Layer w0.15: v1(-2.1,17) -2.533,17.75 cw(c-2.1,18) -2.547,18.225 cw(c-2.1,18) -2.246,18.478 5.777,20.935 ccw(c5.643,21.377) 6.102,21.323 6.602,25.522 cw(c7.62,25.4) 6.682,25.814 pad.3@7.62,27.94
PB10: pad.14@7.62,0 pad.28 | length 14.4
  Top Layer w0.15: pad.28@1.658,9.05 v1(1.9,10)
  Bottom Layer w0.15: v1(1.9,10) 2.65,10.433 cw(c2.9,10) 2.902,10.5 3.898,10.5 ; 3.899,10.5 cw(c3.9,10) 4.381,10.136 6.626,2.288 ccw(c7.62,2.54) 6.682,2.126 pad.14@7.62,0
PB11: pad.13@7.62,2.54 pad.29 | length 14.1
  Top Layer w0.15: v1(1.9,11) 2.332,10.251 cw(c1.9,10) 2.378,9.855 pad.29@2.142,9.069
  Bottom Layer w0.15: v1(1.9,11) 2.65,11.433 cw(c2.9,11) 2.902,11.5 3.898,11.5 cw(c3.9,11) 4.372,11.166 6.642,4.773 ccw(c7.62,5.08) 6.682,4.666 pad.13@7.62,2.54
PB12: pad.12@7.62,5.08 pad.33 | length 5.4
  Top Layer w0.15: pad.33@6.109,10.203 6.611,7.437 ccw(c7.62,7.62) 6.682,7.206 pad.12@7.62,5.08
PB13: pad.11@7.62,7.62 pad.34 | length 3.5
  Top Layer w0.15: pad.34@6.114,10.764 6.359,10.494 cw(c6.175,10.325) 6.407,10.419 6.671,9.772 ccw(c7.62,10.16) 6.682,9.746 pad.11@7.62,7.62
PC0: BP5.1 pad.8@-5.7,14.25 | length 19
  Top Layer w0.15: pad.8@-5.025,14.259 -4.237,14.481 cw(c-4.1,14) -4.099,14.5 ccw(c-4.1,15) -3.85,14.567 v1(-3.1,15)
  Layer 2 w0.15: v1(-6.9,3.8) -3.718,8.176 cw(c-2.1,7) -2.761,8.887 -0.934,9.528 ccw(c-1.1,10) -0.833,9.578 ccw(c-1.1,10) -0.6,10 -0.6,11.998 ; v1(-3.1,15) -2.605,14.563 cw(c-3.1,14) -2.524,14.48 -0.727,12.334 cw(c-1.1,12) -0.6,11.999
  Bottom Layer w0.15: v1(-6.9,3.8) BP5.1@-5.1,3.8
PC1: BP4.1 pad.9@-5.7,13.75 | length 24.2
  Top Layer w0.15: pad.9@-5.05,13.739 v1(-4.1,14)
  Layer 2 w0.15: v1(-4.1,14) -3.35,13.567 ccw(c-3.1,14) -3.1,13.5 ccw(c-3.1,14) -3.098,14.5 ; v1(-3.8,1.3) -4.391,5.769 cw(c-3.4,5.9) -4.242,6.44 -4.173,6.547 -3.363,7.809 cw(c-2.1,7) -2.595,8.416 -0.769,9.056 ccw(c-1.1,10) -0.6,9.134 0.15,9.567 ccw(c-0.1,10) 0.4,10 ccw(c-0.1,10) 0.369,10.173 -0.395,12.257 ccw(c-1.1,12) -0.508,12.46 -2.704,15.305 ccw(c-3.1,15) -3.1,15.5 ccw(c-3.1,15) -3.6,15.001 -3.6,14.999 ccw(c-3.1,15) -3.1,14.5
  Bottom Layer w0.15: v1(-3.8,1.3) BP4.1@-3.147,1.923
PC2: BP3.1 pad.10@-5.7,13.25 | length 27.3
  Top Layer w0.15: pad.10@-5.059,13.254 -4.234,13.482 cw(c-4.1,13) -4.099,13.5 ccw(c-4.1,14) -3.85,13.567 v1(-3.1,14)
  Layer 2 w0.15: v1(-3.1,14) -3.849,14.432 ccw(c-4.1,14) -4.101,14.5 cw(c-4.1,15) -4.6,15 cw(c-4.1,15) -4.1,15.5 -4.098,15.5 ccw(c-4.1,16) -3.6,16 cw(c-3.1,16) -3.1,16.5 cw(c-3.1,16) -2.665,16.247 -0.262,12.546 cw(c-1.1,12) -0.16,12.342 0.603,10.26 cw(c-0.1,10) 0.65,10.002 cw(c-0.1,10) 0.295,9.362 cw(c-0.1,10) 0.275,9.35 -0.475,8.917 cw(c-1.1,10) -0.687,8.82 -2.513,8.18 ccw(c-2.1,7) -3.153,7.674 -4.031,6.305 ccw(c-3.4,5.9) -4.15,5.9 ccw(c-3.4,5.9) -4.123,5.699 v1(-2.9,1.3)
  Bottom Layer w0.15: v1(-2.9,1.3) -2.278,1.715 cw(c-2,1.3) -2.08,1.793 BP3.1@-1.265,1.929
PC3: BP2.1 pad.11@-5.7,12.75 | length 29.8
  Top Layer w0.15: pad.11@-5.052,12.755 v1(-4.1,13)
  Layer 2 w0.15: v1(-4.1,13) -4.533,13.75 cw(c-4.1,14) -4.584,13.875 -4.826,14.813 cw(c-4.1,15) -4.826,15.188 -4.584,16.125 cw(c-4.1,16) -4.102,16.5 -4.1,16.5 ccw(c-4.1,17) -3.6,17 -3.6,17.002 cw(c-3.1,17) -3.1,17.5 cw(c-3.1,17) -2.6,16.999 -2.6,16.996 ccw(c-2.1,17) -2.527,16.74 -0.034,12.653 cw(c-1.1,12) 0.074,12.43 0.838,10.345 cw(c-0.1,10) 0.9,10.002 cw(c-0.1,10) 0.427,9.15 cw(c-0.1,10) 0.4,9.134 -0.35,8.701 cw(c-1.1,10) -0.604,8.585 -2.43,7.944 ccw(c-2.1,7) -2.681,7.814 ccw(c-2.1,7) -2.942,7.539 -3.821,6.17 ccw(c-3.4,5.9) -3.864,5.714 -3.464,4.714 ccw(c-3,4.9) -3.46,4.703 v1(-2,1.3)
  Bottom Layer w0.15: v1(-2,1.3) BP2.1@0.876,1.891
PC4: BP8.1 pad.24 | length 2.4
  Top Layer w0.15: v1(-1.3,7.1) -1.083,7.1 ccw(c-1.083,7.783) -0.6,7.3 ccw(c-1.204,7.904) -0.35,7.904 pad.24
  Bottom Layer w0.15: v1(-1.3,7.1) BP8.1@-0.808,7.1
PC6: pad.5@5.08,0 pad.37 | length 13.6
  Top Layer w0.15: v1(2.9,10) 3.332,10.749 ccw(c2.9,11) 3.4,11.001 cw(c3.9,11) 3.452,11.223 cw(c3.9,11) 3.639,11.427 pad.37@4.869,12.18
  Bottom Layer w0.15: v1(2.9,10) 3.518,9.567 cw(c3.175,9.075) 3.774,9.102 3.801,8.534 ccw(c4.3,8.5) 3.806,8.425 pad.5@5.08,0
PC7: pad.4@2.54,0 pad.38 | length 16.3
  Top Layer w0.15: v1(2.9,11) 3.337,11.495 cw(c3.9,11) 3.435,11.589 pad.38@4.849,12.708
  Bottom Layer w0.15: pad.4@2.54,0 3.002,4.947 cw(c3.5,4.9) 3.018,5.032 3.512,6.832 ccw(c3.175,6.925) 3.525,6.925 3.525,9.075 ccw(c3.175,9.075) 3.245,9.418 ccw(c3.175,9.075) 3.195,9.424 1.871,9.501 cw(c1.9,10) 1.425,10.157 cw(c1.9,10) 1.9,10.5 ccw(c1.9,11) 2.15,10.567 v1(2.9,11)
PC8: pad.3@0,0 pad.39 | length 20.9
  Top Layer w0.15: v1(3.9,13) pad.39@4.86,13.239
  Layer 2 w0.15: pad.3@0,0 4.733,8.25 ccw(c4.3,8.5) 4.748,8.278 ccw(c4.3,8.5) 4.8,8.515 ccw(c4.3,8.5) 4.8,8.517 4.65,13.024 ccw(c3.9,13) 4.644,13.094 4.396,15.062 ccw(c3.9,15) 3.9,15.5 ccw(c3.9,15) 3.4,15 ccw(c3.9,15) 3.416,14.875 v1(3.9,13)
PC9: pad.8@7.62,15.24 pad.40 | length 2.1
  Top Layer w0.15: pad.40@6.167,13.757 pad.8@7.62,15.24
PC13: pad.2@-5.7,17.25 pad.4@-7.62,25.4 | length 10.2
  Top Layer w0.15: pad.2@-5.01,17.258 v1(-4.1,17)
  Bottom Layer w0.15: pad.4@-7.62,25.4 -6.683,23.276 cw(c-7.62,22.86) -6.624,23.103 -5.586,18.881 ccw(c-5.1,19) -5.51,18.715 -4.716,17.572 ccw(c-4.1,18) -4.596,17.438 v1(-4.1,17)
PC14: BP7.1 pad.3@-5.7,16.75 | length 12.8
  Top Layer w0.15: pad.3@-5.005,16.769 -4.255,16.525 ccw(c-4.1,17) -4.195,16.509 ccw(c-4.1,17) -3.85,16.567 v1(-3.1,17)
  Bottom Layer w0.15: v1(-3.1,17) -3.533,16.25 ccw(c-3.1,16) -3.574,16.159 ccw(c-3.1,16) -3.1,15.5 cw(c-3.1,15) -2.713,15.317 -1.329,13.637 cw(c-2.1,13) -1.278,13.57 -0.485,12.43 cw(c-1.1,12) -0.429,12.334 0.57,10.337 cw(c-0.1,10) 0.64,10.124 BP7.1
PC15: BP6.1 pad.4@-5.7,16.25 | length 14.4
  Top Layer w0.15: pad.4@-5.005,16.264 v1(-4.1,16)
  Bottom Layer w0.15: v1(-4.1,16) -3.668,15.251 cw(c-4.1,15) -3.6,14.999 ccw(c-3.1,15) -3.1,14.5 cw(c-3.1,14) -2.813,14.41 -1.673,13.616 cw(c-2.1,13) -1.483,13.427 -0.691,12.287 cw(c-1.1,12) -0.652,12.223 0.347,10.225 cw(c-0.1,10) 0.374,10.159 cw(c-0.1,10) 0.4,10.011 0.475,6.916 ccw(c0.825,6.925) 0.825,6.575 1.175,6.575 ccw(c1.175,6.925) 1.238,6.581 BP6.1@2.818,6.871
SWCK: pad.2@3.08,23.94 pad.49 | length 4.6
  Top Layer w0.15: pad.2@3.08,23.94 2.2,22.465 ccw(c3.08,21.94) 2.488,21.104 3.369,20.48 cw(c3.225,20.275) 3.395,20.458 pad.49@3.6,20.268
SWIO: pad.7@5.08,23.94 pad.46 | length 8.5
  Top Layer w0.15: v1(3.9,18) 4.624,17.026 ccw(c4.825,17.175) 4.645,17.001 pad.46@4.857,16.783
  Layer 2 w0.15: v1(3.9,18) 6.025,21.117 ccw(c5.643,21.377) 6.105,21.377 6.105,22.502 ccw(c5.643,22.502) 6.002,22.793 pad.7@5.08,23.94
USB_N: pad.2@0.65,31.5 SJ3.2 | length 4.7
  Top Layer w0.2: pad.2@0.719,30.482 v1(1.6,29.7)
  Bottom Layer w0.2: SJ3.2@0.627,32.648 0.357,32.276 ccw(c0.6,32.1) 0.3,32.1 0.3,31.5 ccw(c0.6,31.5) 0.362,31.318 v1(1.6,29.7)
USB_P: pad.3@0,31.5 SJ2.2 | length 4.5
  Top Layer w0.2: pad.3@0.047,30.554 v1(0.8,29.7)
  Bottom Layer w0.2: SJ2.2@-0.659,32.693 -0.358,32.277 cw(c-0.6,32.1) -0.31,32.178 -0.075,31.316 ccw(c0.6,31.5) -0.012,31.16 v1(0.8,29.7)
VBAT: BP12.1 pad.1@-5.7,17.75 | length 9.6
  Top Layer w0.15: pad.1@-5.019,17.756 -4.245,17.521 ccw(c-4.1,18) -4.098,17.5 -3.102,17.5 cw(c-3.1,17) -2.6,17 ccw(c-2.1,17) -2.596,16.938 v1(-2.1,13)
  Bottom Layer w0.15: BP12.1@-4.9,13.482 -4.113,13.5 cw(c-4.1,13) -4.099,13.5 cw(c-4.1,13) -3.952,13.477 -3.321,13.283 ccw(c-3.1,14) -3.268,13.269 v1(-2.1,13)
VIN: pad.1@-7.62,33.02 pad.3@0,24.25 SJ1.2 | length 24
  Top Layer w0.4: v1(-0.5,25.2) pad.3@0,24.7 ; pad.3@0,24.1 pad.3@0,24.25
  Layer 2 w0.4: pad.1@-7.62,33.02 -6.52,33.02 -3.4,33.02 0,33.02 ; v1(-0.5,25.2) 0.109,25.727 ccw(c-0.3,26.2) 0.287,25.984 ccw(c-0.3,26.2) 0.185,26.594 -1.686,28.907 cw(c-1.2,29.3) -1.757,29.584 0,33.02 ; v1(5.1,34.1) 3.951,33.209 cw(c3.4,33.92) 3.4,33.02 0,33.02
  Bottom Layer w0.3: SJ1.2 v1(5.1,34.1)
VUSB: pad.1@1.3,31.5 pad.1@5.08,30.48 SJ1.1 | length 5.6
  Top Layer w0.15: pad.1@1.336,30.518 1.897,30.102 cw(c1.6,29.7) 1.914,30.089 v1(2.4,29.7)
  Layer 1 w0.4: v1(2.4,29.7) 4.916,30.561 5.064,30.488 pad.1@5.08,30.48
  Bottom Layer w0.3: pad.1@5.08,30.48 SJ1.1@5.08,31.941

## Polygon pours and split planes (outlines as drawn)
3V3 on Layer 1 "NONET_L-01_P-001" (solid, remove dead copper, shelved, pour order 1): -8,35 8,35 8,0 -8,0
GND on Layer 2 "NONET_L-01_P-001" (solid, remove dead copper, shelved, pour order 3): -8,35 8,35 8,0 -8,0

## Other copper
Top Layer:
  region: -3.4,33.47 -3.4,35.37 -4.5,35.37 -4.5,33.47
  region: 3.4,33.47 3.4,35.37 4.5,35.37 4.5,33.47
  text "TCS" at -1.245,15.2 h1
  text "2020" at -1.269,13.9 h1
  text "csw.cx" at -1.269,12.867 h1

## Silkscreen, mask and mechanical layers (free items; w line width, h text height)
Top Solder:
  region: 3.4,33.47 3.4,35.37 4.5,35.37 4.5,33.47
  region: -3.4,33.47 -3.4,35.37 -4.5,35.37 -4.5,33.47